# EAGLE board SparkFun_LilyPad-Switched-Battery-Panel-v10 (EAGLE 7.3.0)
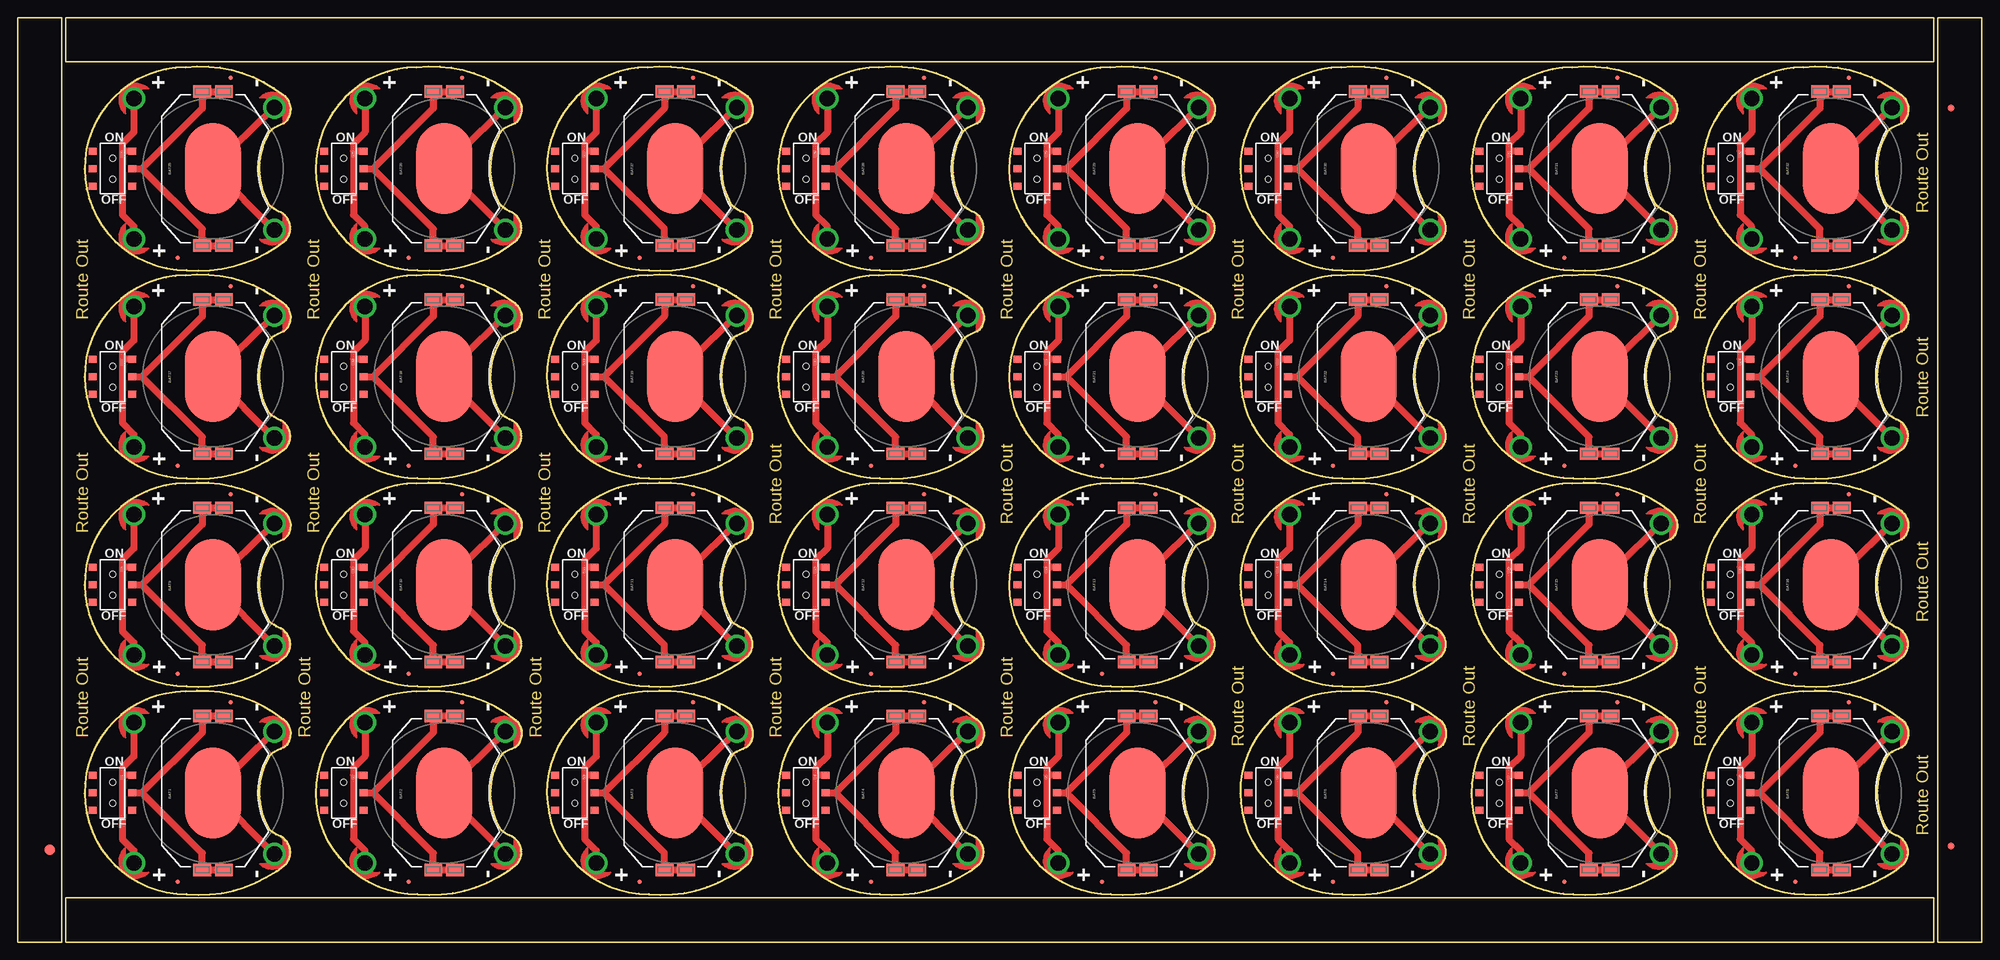
[diagram p0: board, top side]
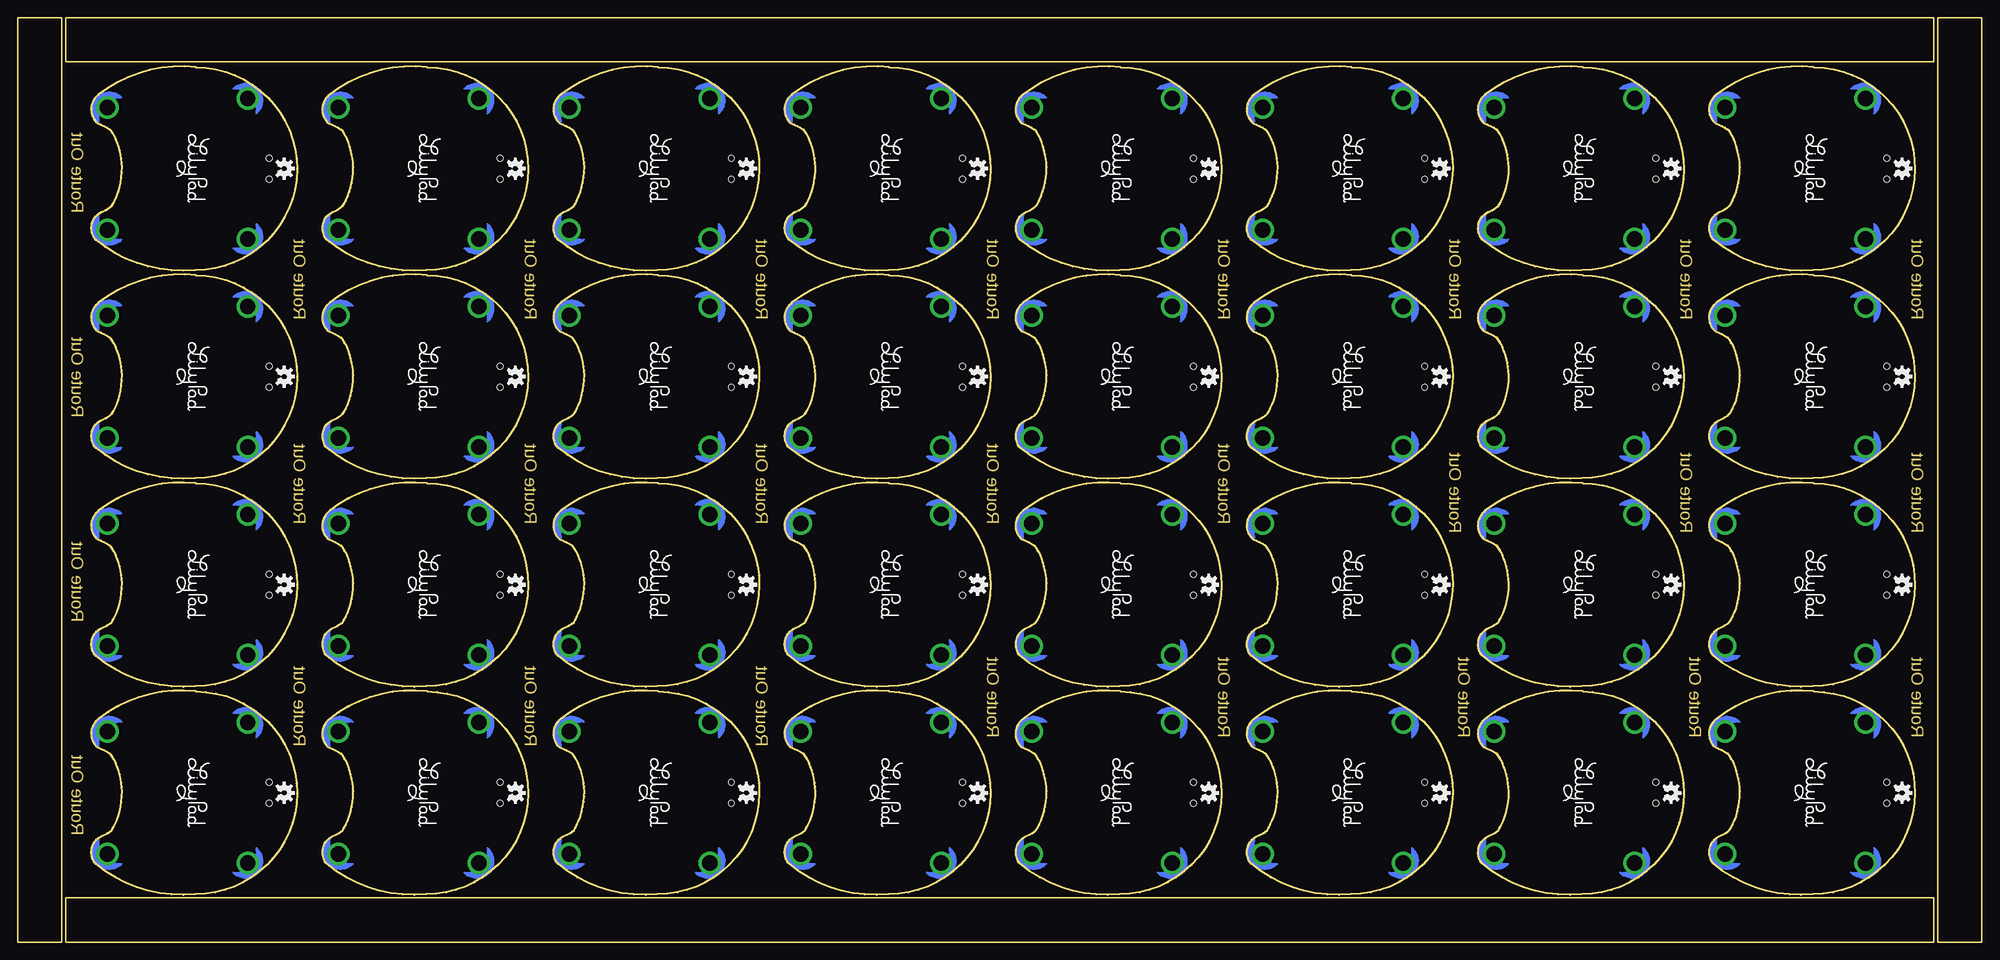
[diagram p1: board, bottom side, seen from below]

Size 280.67 x 132.08 mm. Coordinates in mm from the lower left corner, seen from the top.
Outline: 466 segments
Copper layers (1*16): Top 0.035mm / dielectric 1.5mm / Bottom 0.035mm
Design rules "default": minimum track width 8mil, minimum drill 20mil, track to track 8mil, track to pad 8mil, pad to pad 8mil, via to via 8mil, smd to smd 8mil, copper to edge 8mil, drill to drill 8mil, minimum pad ring 12mil, minimum via ring 10mil, stop-mask expansion 4mil, vias tented up to drill 20mil, thermal gap 10mil

## Footprints (pad centres in the part's own frame; a part is rotated, then mirrored left to right if it is on the bottom)
BATTCON_20MM_4LEGS = smd 1.778 x 2.54: 1 -11,1.55; 3 11,1.55; P$1 -11,-1.55; P$2 11,-1.55 | smd 13 x 8: 2 0,0
FIDUCIAL-1.5X3 = smd 1.5 x 1.5: 1 0,0
FIDUCIAL-1X2 = smd 1 x 1: 1 0,0
MICRO-FIDUCIAL = smd 0.635 x 0.635: 1 0,0
AYZ0202 = smd 1 x 1.15: 1 -2.5,2.825; 2 0,2.825; 3 2.5,2.825; 4 -2.5,-2.825; 5 0,-2.825; 6 2.5,-2.825 | hole 0.85: 1.5,0; -1.5,0
PETAL-SMALL-2SIDE = drill 2.2: 1 0,0

## Placement (x,y rotation side)
BAT1  [BATTCON_20MM_4LEGS]  27.94,21.34 90 top
BAT2  [BATTCON_20MM_4LEGS]  60.96,21.34 90 top
BAT3  [BATTCON_20MM_4LEGS]  93.98,21.34 90 top
BAT4  [BATTCON_20MM_4LEGS]  127,21.34 90 top
BAT5  [BATTCON_20MM_4LEGS]  160.02,21.34 90 top
BAT6  [BATTCON_20MM_4LEGS]  193.04,21.34 90 top
BAT7  [BATTCON_20MM_4LEGS]  226.06,21.34 90 top
BAT8  [BATTCON_20MM_4LEGS]  259.08,21.34 90 top
BAT9  [BATTCON_20MM_4LEGS]  27.94,51.05 90 top
BAT10  [BATTCON_20MM_4LEGS]  60.96,51.05 90 top
BAT11  [BATTCON_20MM_4LEGS]  93.98,51.05 90 top
BAT12  [BATTCON_20MM_4LEGS]  127,51.05 90 top
BAT13  [BATTCON_20MM_4LEGS]  160.02,51.05 90 top
BAT14  [BATTCON_20MM_4LEGS]  193.04,51.05 90 top
BAT15  [BATTCON_20MM_4LEGS]  226.06,51.05 90 top
BAT16  [BATTCON_20MM_4LEGS]  259.08,51.05 90 top
BAT17  [BATTCON_20MM_4LEGS]  27.94,80.77 90 top
BAT18  [BATTCON_20MM_4LEGS]  60.96,80.77 90 top
BAT19  [BATTCON_20MM_4LEGS]  93.98,80.77 90 top
BAT20  [BATTCON_20MM_4LEGS]  127,80.77 90 top
BAT21  [BATTCON_20MM_4LEGS]  160.02,80.77 90 top
BAT22  [BATTCON_20MM_4LEGS]  193.04,80.77 90 top
BAT23  [BATTCON_20MM_4LEGS]  226.06,80.77 90 top
BAT24  [BATTCON_20MM_4LEGS]  259.08,80.77 90 top
BAT25  [BATTCON_20MM_4LEGS]  27.94,110.49 90 top
BAT26  [BATTCON_20MM_4LEGS]  60.96,110.49 90 top
BAT27  [BATTCON_20MM_4LEGS]  93.98,110.49 90 top
BAT28  [BATTCON_20MM_4LEGS]  127,110.49 90 top
BAT29  [BATTCON_20MM_4LEGS]  160.02,110.49 90 top
BAT30  [BATTCON_20MM_4LEGS]  193.04,110.49 90 top
BAT31  [BATTCON_20MM_4LEGS]  226.06,110.49 90 top
BAT32  [BATTCON_20MM_4LEGS]  259.08,110.49 90 top
E$1  [FIDUCIAL-1.5X3]  4.57,13.21 0 top
E$5  [FIDUCIAL-1X2]  276.23,119.13 180 top
E$6  [FIDUCIAL-1X2]  276.23,13.72 0 top
JP1  FIDUCIALUFIDUCIAL  [MICRO-FIDUCIAL]  22.86,8.64 0 top
JP2  FIDUCIALUFIDUCIAL  [MICRO-FIDUCIAL]  30.48,34.29 0 top
JP3  FIDUCIALUFIDUCIAL  [MICRO-FIDUCIAL]  55.88,8.64 0 top
JP4  FIDUCIALUFIDUCIAL  [MICRO-FIDUCIAL]  63.5,34.29 0 top
JP5  FIDUCIALUFIDUCIAL  [MICRO-FIDUCIAL]  88.9,8.64 0 top
JP6  FIDUCIALUFIDUCIAL  [MICRO-FIDUCIAL]  96.52,34.29 0 top
JP7  FIDUCIALUFIDUCIAL  [MICRO-FIDUCIAL]  121.92,8.64 0 top
JP8  FIDUCIALUFIDUCIAL  [MICRO-FIDUCIAL]  129.54,34.29 0 top
JP9  FIDUCIALUFIDUCIAL  [MICRO-FIDUCIAL]  154.94,8.64 0 top
JP10  FIDUCIALUFIDUCIAL  [MICRO-FIDUCIAL]  162.56,34.29 0 top
JP11  FIDUCIALUFIDUCIAL  [MICRO-FIDUCIAL]  187.96,8.64 0 top
JP12  FIDUCIALUFIDUCIAL  [MICRO-FIDUCIAL]  195.58,34.29 0 top
JP13  FIDUCIALUFIDUCIAL  [MICRO-FIDUCIAL]  220.98,8.64 0 top
JP14  FIDUCIALUFIDUCIAL  [MICRO-FIDUCIAL]  228.6,34.29 0 top
JP15  FIDUCIALUFIDUCIAL  [MICRO-FIDUCIAL]  254,8.64 0 top
JP16  FIDUCIALUFIDUCIAL  [MICRO-FIDUCIAL]  261.62,34.29 0 top
JP17  FIDUCIALUFIDUCIAL  [MICRO-FIDUCIAL]  22.86,38.35 0 top
JP18  FIDUCIALUFIDUCIAL  [MICRO-FIDUCIAL]  30.48,64.01 0 top
JP19  FIDUCIALUFIDUCIAL  [MICRO-FIDUCIAL]  55.88,38.35 0 top
JP20  FIDUCIALUFIDUCIAL  [MICRO-FIDUCIAL]  63.5,64.01 0 top
JP21  FIDUCIALUFIDUCIAL  [MICRO-FIDUCIAL]  88.9,38.35 0 top
JP22  FIDUCIALUFIDUCIAL  [MICRO-FIDUCIAL]  96.52,64.01 0 top
JP23  FIDUCIALUFIDUCIAL  [MICRO-FIDUCIAL]  121.92,38.35 0 top
JP24  FIDUCIALUFIDUCIAL  [MICRO-FIDUCIAL]  129.54,64.01 0 top
JP25  FIDUCIALUFIDUCIAL  [MICRO-FIDUCIAL]  154.94,38.35 0 top
JP26  FIDUCIALUFIDUCIAL  [MICRO-FIDUCIAL]  162.56,64.01 0 top
JP27  FIDUCIALUFIDUCIAL  [MICRO-FIDUCIAL]  187.96,38.35 0 top
JP28  FIDUCIALUFIDUCIAL  [MICRO-FIDUCIAL]  195.58,64.01 0 top
JP29  FIDUCIALUFIDUCIAL  [MICRO-FIDUCIAL]  220.98,38.35 0 top
JP30  FIDUCIALUFIDUCIAL  [MICRO-FIDUCIAL]  228.6,64.01 0 top
JP31  FIDUCIALUFIDUCIAL  [MICRO-FIDUCIAL]  254,38.35 0 top
JP32  FIDUCIALUFIDUCIAL  [MICRO-FIDUCIAL]  261.62,64.01 0 top
JP33  FIDUCIALUFIDUCIAL  [MICRO-FIDUCIAL]  22.86,68.07 0 top
JP34  FIDUCIALUFIDUCIAL  [MICRO-FIDUCIAL]  30.48,93.73 0 top
JP35  FIDUCIALUFIDUCIAL  [MICRO-FIDUCIAL]  55.88,68.07 0 top
JP36  FIDUCIALUFIDUCIAL  [MICRO-FIDUCIAL]  63.5,93.73 0 top
JP37  FIDUCIALUFIDUCIAL  [MICRO-FIDUCIAL]  88.9,68.07 0 top
JP38  FIDUCIALUFIDUCIAL  [MICRO-FIDUCIAL]  96.52,93.73 0 top
JP39  FIDUCIALUFIDUCIAL  [MICRO-FIDUCIAL]  121.92,68.07 0 top
JP40  FIDUCIALUFIDUCIAL  [MICRO-FIDUCIAL]  129.54,93.73 0 top
JP41  FIDUCIALUFIDUCIAL  [MICRO-FIDUCIAL]  154.94,68.07 0 top
JP42  FIDUCIALUFIDUCIAL  [MICRO-FIDUCIAL]  162.56,93.73 0 top
JP43  FIDUCIALUFIDUCIAL  [MICRO-FIDUCIAL]  187.96,68.07 0 top
JP44  FIDUCIALUFIDUCIAL  [MICRO-FIDUCIAL]  195.58,93.73 0 top
JP45  FIDUCIALUFIDUCIAL  [MICRO-FIDUCIAL]  220.98,68.07 0 top
JP46  FIDUCIALUFIDUCIAL  [MICRO-FIDUCIAL]  228.6,93.73 0 top
JP47  FIDUCIALUFIDUCIAL  [MICRO-FIDUCIAL]  254,68.07 0 top
JP48  FIDUCIALUFIDUCIAL  [MICRO-FIDUCIAL]  261.62,93.73 0 top
JP49  FIDUCIALUFIDUCIAL  [MICRO-FIDUCIAL]  22.86,97.79 0 top
JP50  FIDUCIALUFIDUCIAL  [MICRO-FIDUCIAL]  30.48,123.44 0 top
JP51  FIDUCIALUFIDUCIAL  [MICRO-FIDUCIAL]  55.88,97.79 0 top
JP52  FIDUCIALUFIDUCIAL  [MICRO-FIDUCIAL]  63.5,123.44 0 top
JP53  FIDUCIALUFIDUCIAL  [MICRO-FIDUCIAL]  88.9,97.79 0 top
JP54  FIDUCIALUFIDUCIAL  [MICRO-FIDUCIAL]  96.52,123.44 0 top
JP55  FIDUCIALUFIDUCIAL  [MICRO-FIDUCIAL]  121.92,97.79 0 top
JP56  FIDUCIALUFIDUCIAL  [MICRO-FIDUCIAL]  129.54,123.44 0 top
JP57  FIDUCIALUFIDUCIAL  [MICRO-FIDUCIAL]  154.94,97.79 0 top
JP58  FIDUCIALUFIDUCIAL  [MICRO-FIDUCIAL]  162.56,123.44 0 top
JP59  FIDUCIALUFIDUCIAL  [MICRO-FIDUCIAL]  187.96,97.79 0 top
JP60  FIDUCIALUFIDUCIAL  [MICRO-FIDUCIAL]  195.58,123.44 0 top
JP61  FIDUCIALUFIDUCIAL  [MICRO-FIDUCIAL]  220.98,97.79 0 top
JP62  FIDUCIALUFIDUCIAL  [MICRO-FIDUCIAL]  228.6,123.44 0 top
JP63  FIDUCIALUFIDUCIAL  [MICRO-FIDUCIAL]  254,97.79 0 top
JP64  FIDUCIALUFIDUCIAL  [MICRO-FIDUCIAL]  261.62,123.44 0 top
S1  [AYZ0202]  13.59,21.34 270 top
S2  [AYZ0202]  46.61,21.34 270 top
S3  [AYZ0202]  79.63,21.34 270 top
S4  [AYZ0202]  112.65,21.34 270 top
S5  [AYZ0202]  145.67,21.34 270 top
S6  [AYZ0202]  178.69,21.34 270 top
S7  [AYZ0202]  211.71,21.34 270 top
S8  [AYZ0202]  244.73,21.34 270 top
S9  [AYZ0202]  13.59,51.05 270 top
S10  [AYZ0202]  46.61,51.05 270 top
S11  [AYZ0202]  79.63,51.05 270 top
S12  [AYZ0202]  112.65,51.05 270 top
S13  [AYZ0202]  145.67,51.05 270 top
S14  [AYZ0202]  178.69,51.05 270 top
S15  [AYZ0202]  211.71,51.05 270 top
S16  [AYZ0202]  244.73,51.05 270 top
S17  [AYZ0202]  13.59,80.77 270 top
S18  [AYZ0202]  46.61,80.77 270 top
S19  [AYZ0202]  79.63,80.77 270 top
S20  [AYZ0202]  112.65,80.77 270 top
S21  [AYZ0202]  145.67,80.77 270 top
S22  [AYZ0202]  178.69,80.77 270 top
S23  [AYZ0202]  211.71,80.77 270 top
S24  [AYZ0202]  244.73,80.77 270 top
S25  [AYZ0202]  13.59,110.49 270 top
S26  [AYZ0202]  46.61,110.49 270 top
S27  [AYZ0202]  79.63,110.49 270 top
S28  [AYZ0202]  112.65,110.49 270 top
S29  [AYZ0202]  145.67,110.49 270 top
S30  [AYZ0202]  178.69,110.49 270 top
S31  [AYZ0202]  211.71,110.49 270 top
S32  [AYZ0202]  244.73,110.49 270 top
U$1  SEWTAP6  [PETAL-SMALL-2SIDE]  36.7,12.57 47 top
U$2  SEWTAP6  [PETAL-SMALL-2SIDE]  16.64,11.3 313 top
U$3  SEWTAP6  [PETAL-SMALL-2SIDE]  36.7,30.1 133 top
U$4  SEWTAP6  [PETAL-SMALL-2SIDE]  16.64,31.37 227 top
U$5  LOGO-LPLP  [LOGO-LILYPAD]  24.13,21.34 270 bottom
U$6  SEWTAP6  [PETAL-SMALL-2SIDE]  69.72,12.57 47 top
U$7  OSHW-LOGOS  [OSHW-LOGO-S]  11.43,21.34 270 bottom
U$8  SEWTAP6  [PETAL-SMALL-2SIDE]  49.66,11.3 313 top
U$9  SEWTAP6  [PETAL-SMALL-2SIDE]  69.72,30.1 133 top
U$10  SEWTAP6  [PETAL-SMALL-2SIDE]  49.66,31.37 227 top
U$11  LOGO-LPLP  [LOGO-LILYPAD]  57.15,21.34 270 bottom
U$12  OSHW-LOGOS  [OSHW-LOGO-S]  44.45,21.34 270 bottom
U$13  SEWTAP6  [PETAL-SMALL-2SIDE]  102.74,12.57 47 top
U$14  SEWTAP6  [PETAL-SMALL-2SIDE]  82.68,11.3 313 top
U$15  SEWTAP6  [PETAL-SMALL-2SIDE]  102.74,30.1 133 top
U$16  SEWTAP6  [PETAL-SMALL-2SIDE]  82.68,31.37 227 top
U$17  LOGO-LPLP  [LOGO-LILYPAD]  90.17,21.34 270 bottom
U$18  OSHW-LOGOS  [OSHW-LOGO-S]  77.47,21.34 270 bottom
U$19  SEWTAP6  [PETAL-SMALL-2SIDE]  135.76,12.57 47 top
U$20  SEWTAP6  [PETAL-SMALL-2SIDE]  115.7,11.3 313 top
U$21  SEWTAP6  [PETAL-SMALL-2SIDE]  135.76,30.1 133 top
U$22  SEWTAP6  [PETAL-SMALL-2SIDE]  115.7,31.37 227 top
U$23  LOGO-LPLP  [LOGO-LILYPAD]  123.19,21.34 270 bottom
U$24  OSHW-LOGOS  [OSHW-LOGO-S]  110.49,21.34 270 bottom
U$25  SEWTAP6  [PETAL-SMALL-2SIDE]  168.78,12.57 47 top
U$26  SEWTAP6  [PETAL-SMALL-2SIDE]  148.72,11.3 313 top
U$27  SEWTAP6  [PETAL-SMALL-2SIDE]  168.78,30.1 133 top
U$28  SEWTAP6  [PETAL-SMALL-2SIDE]  148.72,31.37 227 top
U$29  LOGO-LPLP  [LOGO-LILYPAD]  156.21,21.34 270 bottom
U$30  OSHW-LOGOS  [OSHW-LOGO-S]  143.51,21.34 270 bottom
U$31  SEWTAP6  [PETAL-SMALL-2SIDE]  201.8,12.57 47 top
U$32  SEWTAP6  [PETAL-SMALL-2SIDE]  181.74,11.3 313 top
U$33  SEWTAP6  [PETAL-SMALL-2SIDE]  201.8,30.1 133 top
U$34  SEWTAP6  [PETAL-SMALL-2SIDE]  181.74,31.37 227 top
U$35  LOGO-LPLP  [LOGO-LILYPAD]  189.23,21.34 270 bottom
U$36  OSHW-LOGOS  [OSHW-LOGO-S]  176.53,21.34 270 bottom
U$37  SEWTAP6  [PETAL-SMALL-2SIDE]  234.82,12.57 47 top
U$38  SEWTAP6  [PETAL-SMALL-2SIDE]  214.76,11.3 313 top
U$39  SEWTAP6  [PETAL-SMALL-2SIDE]  234.82,30.1 133 top
U$40  SEWTAP6  [PETAL-SMALL-2SIDE]  214.76,31.37 227 top
U$41  LOGO-LPLP  [LOGO-LILYPAD]  222.25,21.34 270 bottom
U$42  OSHW-LOGOS  [OSHW-LOGO-S]  209.55,21.34 270 bottom
U$43  SEWTAP6  [PETAL-SMALL-2SIDE]  267.84,12.57 47 top
U$44  SEWTAP6  [PETAL-SMALL-2SIDE]  247.78,11.3 313 top
U$45  SEWTAP6  [PETAL-SMALL-2SIDE]  267.84,30.1 133 top
U$46  SEWTAP6  [PETAL-SMALL-2SIDE]  247.78,31.37 227 top
U$47  LOGO-LPLP  [LOGO-LILYPAD]  255.27,21.34 270 bottom
U$48  OSHW-LOGOS  [OSHW-LOGO-S]  242.57,21.34 270 bottom
U$49  SEWTAP6  [PETAL-SMALL-2SIDE]  36.7,42.29 47 top
U$50  SEWTAP6  [PETAL-SMALL-2SIDE]  16.64,41.02 313 top
U$51  SEWTAP6  [PETAL-SMALL-2SIDE]  36.7,59.82 133 top
U$52  SEWTAP6  [PETAL-SMALL-2SIDE]  16.64,61.09 227 top
U$53  LOGO-LPLP  [LOGO-LILYPAD]  24.13,51.05 270 bottom
U$54  OSHW-LOGOS  [OSHW-LOGO-S]  11.43,51.05 270 bottom
U$55  SEWTAP6  [PETAL-SMALL-2SIDE]  69.72,42.29 47 top
U$56  SEWTAP6  [PETAL-SMALL-2SIDE]  49.66,41.02 313 top
U$57  SEWTAP6  [PETAL-SMALL-2SIDE]  69.72,59.82 133 top
U$58  SEWTAP6  [PETAL-SMALL-2SIDE]  49.66,61.09 227 top
U$59  LOGO-LPLP  [LOGO-LILYPAD]  57.15,51.05 270 bottom
U$60  OSHW-LOGOS  [OSHW-LOGO-S]  44.45,51.05 270 bottom
U$61  SEWTAP6  [PETAL-SMALL-2SIDE]  102.74,42.29 47 top
U$62  SEWTAP6  [PETAL-SMALL-2SIDE]  82.68,41.02 313 top
U$63  SEWTAP6  [PETAL-SMALL-2SIDE]  102.74,59.82 133 top
U$64  SEWTAP6  [PETAL-SMALL-2SIDE]  82.68,61.09 227 top
U$65  LOGO-LPLP  [LOGO-LILYPAD]  90.17,51.05 270 bottom
U$66  OSHW-LOGOS  [OSHW-LOGO-S]  77.47,51.05 270 bottom
U$67  SEWTAP6  [PETAL-SMALL-2SIDE]  135.76,42.29 47 top
U$68  SEWTAP6  [PETAL-SMALL-2SIDE]  115.7,41.02 313 top
U$69  SEWTAP6  [PETAL-SMALL-2SIDE]  135.76,59.82 133 top
U$70  SEWTAP6  [PETAL-SMALL-2SIDE]  115.7,61.09 227 top
U$71  LOGO-LPLP  [LOGO-LILYPAD]  123.19,51.05 270 bottom
U$72  OSHW-LOGOS  [OSHW-LOGO-S]  110.49,51.05 270 bottom
U$73  SEWTAP6  [PETAL-SMALL-2SIDE]  168.78,42.29 47 top
U$74  SEWTAP6  [PETAL-SMALL-2SIDE]  148.72,41.02 313 top
U$75  SEWTAP6  [PETAL-SMALL-2SIDE]  168.78,59.82 133 top
U$76  SEWTAP6  [PETAL-SMALL-2SIDE]  148.72,61.09 227 top
U$77  LOGO-LPLP  [LOGO-LILYPAD]  156.21,51.05 270 bottom
U$78  OSHW-LOGOS  [OSHW-LOGO-S]  143.51,51.05 270 bottom
U$79  SEWTAP6  [PETAL-SMALL-2SIDE]  201.8,42.29 47 top
U$80  SEWTAP6  [PETAL-SMALL-2SIDE]  181.74,41.02 313 top
U$81  SEWTAP6  [PETAL-SMALL-2SIDE]  201.8,59.82 133 top
U$82  SEWTAP6  [PETAL-SMALL-2SIDE]  181.74,61.09 227 top
U$83  LOGO-LPLP  [LOGO-LILYPAD]  189.23,51.05 270 bottom
U$84  OSHW-LOGOS  [OSHW-LOGO-S]  176.53,51.05 270 bottom
U$85  SEWTAP6  [PETAL-SMALL-2SIDE]  234.82,42.29 47 top
U$86  SEWTAP6  [PETAL-SMALL-2SIDE]  214.76,41.02 313 top
U$87  SEWTAP6  [PETAL-SMALL-2SIDE]  234.82,59.82 133 top
U$88  SEWTAP6  [PETAL-SMALL-2SIDE]  214.76,61.09 227 top
U$89  LOGO-LPLP  [LOGO-LILYPAD]  222.25,51.05 270 bottom
U$90  OSHW-LOGOS  [OSHW-LOGO-S]  209.55,51.05 270 bottom
U$91  SEWTAP6  [PETAL-SMALL-2SIDE]  267.84,42.29 47 top
U$92  SEWTAP6  [PETAL-SMALL-2SIDE]  247.78,41.02 313 top
U$93  SEWTAP6  [PETAL-SMALL-2SIDE]  267.84,59.82 133 top
U$94  SEWTAP6  [PETAL-SMALL-2SIDE]  247.78,61.09 227 top
U$95  LOGO-LPLP  [LOGO-LILYPAD]  255.27,51.05 270 bottom
U$96  OSHW-LOGOS  [OSHW-LOGO-S]  242.57,51.05 270 bottom
U$97  SEWTAP6  [PETAL-SMALL-2SIDE]  36.7,72.01 47 top
U$98  SEWTAP6  [PETAL-SMALL-2SIDE]  16.64,70.74 313 top
U$99  SEWTAP6  [PETAL-SMALL-2SIDE]  36.7,89.53 133 top
U$100  SEWTAP6  [PETAL-SMALL-2SIDE]  16.64,90.81 227 top
U$101  LOGO-LPLP  [LOGO-LILYPAD]  24.13,80.77 270 bottom
U$102  OSHW-LOGOS  [OSHW-LOGO-S]  11.43,80.77 270 bottom
U$103  SEWTAP6  [PETAL-SMALL-2SIDE]  69.72,72.01 47 top
U$104  SEWTAP6  [PETAL-SMALL-2SIDE]  49.66,70.74 313 top
U$105  SEWTAP6  [PETAL-SMALL-2SIDE]  69.72,89.53 133 top
U$106  SEWTAP6  [PETAL-SMALL-2SIDE]  49.66,90.81 227 top
U$107  LOGO-LPLP  [LOGO-LILYPAD]  57.15,80.77 270 bottom
U$108  OSHW-LOGOS  [OSHW-LOGO-S]  44.45,80.77 270 bottom
U$109  SEWTAP6  [PETAL-SMALL-2SIDE]  102.74,72.01 47 top
U$110  SEWTAP6  [PETAL-SMALL-2SIDE]  82.68,70.74 313 top
U$111  SEWTAP6  [PETAL-SMALL-2SIDE]  102.74,89.53 133 top
U$112  SEWTAP6  [PETAL-SMALL-2SIDE]  82.68,90.81 227 top
U$113  LOGO-LPLP  [LOGO-LILYPAD]  90.17,80.77 270 bottom
U$114  OSHW-LOGOS  [OSHW-LOGO-S]  77.47,80.77 270 bottom
U$115  SEWTAP6  [PETAL-SMALL-2SIDE]  135.76,72.01 47 top
U$116  SEWTAP6  [PETAL-SMALL-2SIDE]  115.7,70.74 313 top
U$117  SEWTAP6  [PETAL-SMALL-2SIDE]  135.76,89.53 133 top
U$118  SEWTAP6  [PETAL-SMALL-2SIDE]  115.7,90.81 227 top
U$119  LOGO-LPLP  [LOGO-LILYPAD]  123.19,80.77 270 bottom
U$120  OSHW-LOGOS  [OSHW-LOGO-S]  110.49,80.77 270 bottom
U$121  SEWTAP6  [PETAL-SMALL-2SIDE]  168.78,72.01 47 top
U$122  SEWTAP6  [PETAL-SMALL-2SIDE]  148.72,70.74 313 top
U$123  SEWTAP6  [PETAL-SMALL-2SIDE]  168.78,89.53 133 top
U$124  SEWTAP6  [PETAL-SMALL-2SIDE]  148.72,90.81 227 top
U$125  LOGO-LPLP  [LOGO-LILYPAD]  156.21,80.77 270 bottom
U$126  OSHW-LOGOS  [OSHW-LOGO-S]  143.51,80.77 270 bottom
U$127  SEWTAP6  [PETAL-SMALL-2SIDE]  201.8,72.01 47 top
U$128  SEWTAP6  [PETAL-SMALL-2SIDE]  181.74,70.74 313 top
U$129  SEWTAP6  [PETAL-SMALL-2SIDE]  201.8,89.53 133 top
U$130  SEWTAP6  [PETAL-SMALL-2SIDE]  181.74,90.81 227 top
U$131  LOGO-LPLP  [LOGO-LILYPAD]  189.23,80.77 270 bottom
U$132  OSHW-LOGOS  [OSHW-LOGO-S]  176.53,80.77 270 bottom
U$133  SEWTAP6  [PETAL-SMALL-2SIDE]  234.82,72.01 47 top
U$134  SEWTAP6  [PETAL-SMALL-2SIDE]  214.76,70.74 313 top
U$135  SEWTAP6  [PETAL-SMALL-2SIDE]  234.82,89.53 133 top
U$136  SEWTAP6  [PETAL-SMALL-2SIDE]  214.76,90.81 227 top
U$137  LOGO-LPLP  [LOGO-LILYPAD]  222.25,80.77 270 bottom
U$138  OSHW-LOGOS  [OSHW-LOGO-S]  209.55,80.77 270 bottom
U$139  SEWTAP6  [PETAL-SMALL-2SIDE]  267.84,72.01 47 top
U$140  SEWTAP6  [PETAL-SMALL-2SIDE]  247.78,70.74 313 top
U$141  SEWTAP6  [PETAL-SMALL-2SIDE]  267.84,89.53 133 top
U$142  SEWTAP6  [PETAL-SMALL-2SIDE]  247.78,90.81 227 top
U$143  LOGO-LPLP  [LOGO-LILYPAD]  255.27,80.77 270 bottom
U$144  OSHW-LOGOS  [OSHW-LOGO-S]  242.57,80.77 270 bottom
U$145  SEWTAP6  [PETAL-SMALL-2SIDE]  36.7,101.73 47 top
U$146  SEWTAP6  [PETAL-SMALL-2SIDE]  16.64,100.46 313 top
U$147  SEWTAP6  [PETAL-SMALL-2SIDE]  36.7,119.25 133 top
U$148  SEWTAP6  [PETAL-SMALL-2SIDE]  16.64,120.52 227 top
U$149  LOGO-LPLP  [LOGO-LILYPAD]  24.13,110.49 270 bottom
U$150  OSHW-LOGOS  [OSHW-LOGO-S]  11.43,110.49 270 bottom
U$151  SEWTAP6  [PETAL-SMALL-2SIDE]  69.72,101.73 47 top
U$152  SEWTAP6  [PETAL-SMALL-2SIDE]  49.66,100.46 313 top
U$153  SEWTAP6  [PETAL-SMALL-2SIDE]  69.72,119.25 133 top
U$154  SEWTAP6  [PETAL-SMALL-2SIDE]  49.66,120.52 227 top
U$155  LOGO-LPLP  [LOGO-LILYPAD]  57.15,110.49 270 bottom
U$156  OSHW-LOGOS  [OSHW-LOGO-S]  44.45,110.49 270 bottom
U$157  SEWTAP6  [PETAL-SMALL-2SIDE]  102.74,101.73 47 top
U$158  SEWTAP6  [PETAL-SMALL-2SIDE]  82.68,100.46 313 top
U$159  SEWTAP6  [PETAL-SMALL-2SIDE]  102.74,119.25 133 top
U$160  SEWTAP6  [PETAL-SMALL-2SIDE]  82.68,120.52 227 top
U$161  LOGO-LPLP  [LOGO-LILYPAD]  90.17,110.49 270 bottom
U$162  OSHW-LOGOS  [OSHW-LOGO-S]  77.47,110.49 270 bottom
U$163  SEWTAP6  [PETAL-SMALL-2SIDE]  135.76,101.73 47 top
U$164  SEWTAP6  [PETAL-SMALL-2SIDE]  115.7,100.46 313 top
U$165  SEWTAP6  [PETAL-SMALL-2SIDE]  135.76,119.25 133 top
U$166  SEWTAP6  [PETAL-SMALL-2SIDE]  115.7,120.52 227 top
U$167  LOGO-LPLP  [LOGO-LILYPAD]  123.19,110.49 270 bottom
U$168  OSHW-LOGOS  [OSHW-LOGO-S]  110.49,110.49 270 bottom
U$169  SEWTAP6  [PETAL-SMALL-2SIDE]  168.78,101.73 47 top
U$170  SEWTAP6  [PETAL-SMALL-2SIDE]  148.72,100.46 313 top
U$171  SEWTAP6  [PETAL-SMALL-2SIDE]  168.78,119.25 133 top
U$172  SEWTAP6  [PETAL-SMALL-2SIDE]  148.72,120.52 227 top
U$173  LOGO-LPLP  [LOGO-LILYPAD]  156.21,110.49 270 bottom
U$174  OSHW-LOGOS  [OSHW-LOGO-S]  143.51,110.49 270 bottom
U$175  SEWTAP6  [PETAL-SMALL-2SIDE]  201.8,101.73 47 top
U$176  SEWTAP6  [PETAL-SMALL-2SIDE]  181.74,100.46 313 top
U$177  SEWTAP6  [PETAL-SMALL-2SIDE]  201.8,119.25 133 top
U$178  SEWTAP6  [PETAL-SMALL-2SIDE]  181.74,120.52 227 top
U$179  LOGO-LPLP  [LOGO-LILYPAD]  189.23,110.49 270 bottom
U$180  OSHW-LOGOS  [OSHW-LOGO-S]  176.53,110.49 270 bottom
U$181  SEWTAP6  [PETAL-SMALL-2SIDE]  234.82,101.73 47 top
U$182  SEWTAP6  [PETAL-SMALL-2SIDE]  214.76,100.46 313 top
U$183  SEWTAP6  [PETAL-SMALL-2SIDE]  234.82,119.25 133 top
U$184  SEWTAP6  [PETAL-SMALL-2SIDE]  214.76,120.52 227 top
U$185  LOGO-LPLP  [LOGO-LILYPAD]  222.25,110.49 270 bottom
U$186  OSHW-LOGOS  [OSHW-LOGO-S]  209.55,110.49 270 bottom
U$187  SEWTAP6  [PETAL-SMALL-2SIDE]  267.84,101.73 47 top
U$188  SEWTAP6  [PETAL-SMALL-2SIDE]  247.78,100.46 313 top
U$189  SEWTAP6  [PETAL-SMALL-2SIDE]  267.84,119.25 133 top
U$190  SEWTAP6  [PETAL-SMALL-2SIDE]  247.78,120.52 227 top
U$191  LOGO-LPLP  [LOGO-LILYPAD]  255.27,110.49 270 bottom
U$192  OSHW-LOGOS  [OSHW-LOGO-S]  242.57,110.49 270 bottom

## Library data of the parts
BAT1-BAT32 = SparkFun-Electromechanical
E$1 = SparkFun-Retired
E$5 E$6 U$7 U$12 U$18 U$24 U$30 U$36 U$42 U$48 U$54 U$60 U$66 U$72 U$78 U$84 U$90 U$96 U$102 U$108 U$114 U$120 U$126 U$132 U$138 U$144 U$150 U$156 U$162 U$168 U$174 U$180 U$186 U$192 = SparkFun-Aesthetics
JP1-JP64 S1-S32 = SparkFun
U$1-U$6 U$8-U$11 U$13-U$17 U$19-U$23 U$25-U$29 U$31-U$35 U$37-U$41 U$43-U$47 U$49-U$53 U$55-U$59 U$61-U$65 U$67-U$71 U$73-U$77 U$79-U$83 U$85-U$89 U$91-U$95 U$97-U$101 U$103-U$107 U$109-U$113 U$115-U$119 U$121-U$125 U$127-U$131 U$133-U$137 U$139-U$143 U$145-U$149 U$151-U$155 U$157-U$161 U$163-U$167 U$169-U$173 U$175-U$179 U$181-U$185 U$187-U$191 = LilyPad-Wearables

## Nets
N$1: S1.1 U$2.1 U$4.1
N$2: BAT1.2 U$1.1 U$3.1
N$3: BAT1.1 BAT1.3 BAT1.P$1 BAT1.P$2 S1.2
N$4: BAT2.2 U$6.1 U$9.1
N$5: S2.1 U$8.1 U$10.1
N$6: BAT2.1 BAT2.3 BAT2.P$1 BAT2.P$2 S2.2
N$7: BAT3.2 U$13.1 U$15.1
N$8: S3.1 U$14.1 U$16.1
N$9: BAT3.1 BAT3.3 BAT3.P$1 BAT3.P$2 S3.2
N$10: BAT4.2 U$19.1 U$21.1
N$11: S4.1 U$20.1 U$22.1
N$12: BAT4.1 BAT4.3 BAT4.P$1 BAT4.P$2 S4.2
N$13: BAT5.2 U$25.1 U$27.1
N$14: S5.1 U$26.1 U$28.1
N$15: BAT5.1 BAT5.3 BAT5.P$1 BAT5.P$2 S5.2
N$16: BAT6.2 U$31.1 U$33.1
N$17: S6.1 U$32.1 U$34.1
N$18: BAT6.1 BAT6.3 BAT6.P$1 BAT6.P$2 S6.2
N$19: BAT7.2 U$37.1 U$39.1
N$20: S7.1 U$38.1 U$40.1
N$21: BAT7.1 BAT7.3 BAT7.P$1 BAT7.P$2 S7.2
N$22: BAT8.2 U$43.1 U$45.1
N$23: S8.1 U$44.1 U$46.1
N$24: BAT8.1 BAT8.3 BAT8.P$1 BAT8.P$2 S8.2
N$25: BAT9.2 U$49.1 U$51.1
N$26: S9.1 U$50.1 U$52.1
N$27: BAT9.1 BAT9.3 BAT9.P$1 BAT9.P$2 S9.2
N$28: BAT10.2 U$55.1 U$57.1
N$29: S10.1 U$56.1 U$58.1
N$30: BAT10.1 BAT10.3 BAT10.P$1 BAT10.P$2 S10.2
N$31: BAT11.2 U$61.1 U$63.1
N$32: S11.1 U$62.1 U$64.1
N$33: BAT11.1 BAT11.3 BAT11.P$1 BAT11.P$2 S11.2
N$34: BAT12.2 U$67.1 U$69.1
N$35: S12.1 U$68.1 U$70.1
N$36: BAT12.1 BAT12.3 BAT12.P$1 BAT12.P$2 S12.2
N$37: BAT13.2 U$73.1 U$75.1
N$38: S13.1 U$74.1 U$76.1
N$39: BAT13.1 BAT13.3 BAT13.P$1 BAT13.P$2 S13.2
N$40: BAT14.2 U$79.1 U$81.1
N$41: S14.1 U$80.1 U$82.1
N$42: BAT14.1 BAT14.3 BAT14.P$1 BAT14.P$2 S14.2
N$43: BAT15.2 U$85.1 U$87.1
N$44: S15.1 U$86.1 U$88.1
N$45: BAT15.1 BAT15.3 BAT15.P$1 BAT15.P$2 S15.2
N$46: BAT16.2 U$91.1 U$93.1
N$47: S16.1 U$92.1 U$94.1
N$48: BAT16.1 BAT16.3 BAT16.P$1 BAT16.P$2 S16.2
N$49: BAT17.2 U$97.1 U$99.1
N$50: S17.1 U$98.1 U$100.1
N$51: BAT17.1 BAT17.3 BAT17.P$1 BAT17.P$2 S17.2
N$52: BAT18.2 U$103.1 U$105.1
N$53: S18.1 U$104.1 U$106.1
N$54: BAT18.1 BAT18.3 BAT18.P$1 BAT18.P$2 S18.2
N$55: BAT19.2 U$109.1 U$111.1
N$56: S19.1 U$110.1 U$112.1
N$57: BAT19.1 BAT19.3 BAT19.P$1 BAT19.P$2 S19.2
N$58: BAT20.2 U$115.1 U$117.1
N$59: S20.1 U$116.1 U$118.1
N$60: BAT20.1 BAT20.3 BAT20.P$1 BAT20.P$2 S20.2
N$61: BAT21.2 U$121.1 U$123.1
N$62: S21.1 U$122.1 U$124.1
N$63: BAT21.1 BAT21.3 BAT21.P$1 BAT21.P$2 S21.2
N$64: BAT22.2 U$127.1 U$129.1
N$65: S22.1 U$128.1 U$130.1
N$66: BAT22.1 BAT22.3 BAT22.P$1 BAT22.P$2 S22.2
N$67: BAT23.2 U$133.1 U$135.1
N$68: S23.1 U$134.1 U$136.1
N$69: BAT23.1 BAT23.3 BAT23.P$1 BAT23.P$2 S23.2
N$70: BAT24.2 U$139.1 U$141.1
N$71: S24.1 U$140.1 U$142.1
N$72: BAT24.1 BAT24.3 BAT24.P$1 BAT24.P$2 S24.2
N$73: BAT25.2 U$145.1 U$147.1
N$74: S25.1 U$146.1 U$148.1
N$75: BAT25.1 BAT25.3 BAT25.P$1 BAT25.P$2 S25.2
N$76: BAT26.2 U$151.1 U$153.1
N$77: S26.1 U$152.1 U$154.1
N$78: BAT26.1 BAT26.3 BAT26.P$1 BAT26.P$2 S26.2
N$79: BAT27.2 U$157.1 U$159.1
N$80: S27.1 U$158.1 U$160.1
N$81: BAT27.1 BAT27.3 BAT27.P$1 BAT27.P$2 S27.2
N$82: BAT28.2 U$163.1 U$165.1
N$83: S28.1 U$164.1 U$166.1
N$84: BAT28.1 BAT28.3 BAT28.P$1 BAT28.P$2 S28.2
N$85: BAT29.2 U$169.1 U$171.1
N$86: S29.1 U$170.1 U$172.1
N$87: BAT29.1 BAT29.3 BAT29.P$1 BAT29.P$2 S29.2
N$88: BAT30.2 U$175.1 U$177.1
N$89: S30.1 U$176.1 U$178.1
N$90: BAT30.1 BAT30.3 BAT30.P$1 BAT30.P$2 S30.2
N$91: BAT31.2 U$181.1 U$183.1
N$92: S31.1 U$182.1 U$184.1
N$93: BAT31.1 BAT31.3 BAT31.P$1 BAT31.P$2 S31.2
N$94: BAT32.2 U$187.1 U$189.1
N$95: S32.1 U$188.1 U$190.1
N$96: BAT32.1 BAT32.3 BAT32.P$1 BAT32.P$2 S32.2

## Tracks (layer width: path | path; a pad name or v marks a point on that pad's centre or on a via)
N$1
  Top 1.016: U$4.1 16.64,26.54 14.99,24.89 14.99,23.88 | 14.99,23.88 14.99,14.73 16.64,13.08 U$2.1 | S1.1 15.03,23.84 14.99,23.88
N$2
  Top 1.016: 37.59,11.68 U$1.1 BAT1.2 27.94,21.59 U$3.1
N$3
  Top 1.016: S1.2 17.78,21.34 | 17.78,21.34 26.39,12.73 BAT1.1 BAT1.P$1 | BAT1.P$2 BAT1.3 26.39,29.95 17.78,21.34
N$4
  Top 1.016: 70.61,11.68 U$6.1 BAT2.2 60.96,21.59 U$9.1
N$5
  Top 1.016: U$10.1 49.66,26.54 48.01,24.89 48.01,23.88 | 48.01,23.88 48.01,14.73 49.66,13.08 U$8.1 | S2.1 48.05,23.84 48.01,23.88
N$6
  Top 1.016: S2.2 50.8,21.34 | 50.8,21.34 59.41,12.73 BAT2.1 BAT2.P$1 | BAT2.P$2 BAT2.3 59.41,29.95 50.8,21.34
N$7
  Top 1.016: 103.63,11.68 U$13.1 BAT3.2 93.98,21.59 U$15.1
N$8
  Top 1.016: U$16.1 82.68,26.54 81.03,24.89 81.03,23.88 | 81.03,23.88 81.03,14.73 82.68,13.08 U$14.1 | S3.1 81.07,23.84 81.03,23.88
N$9
  Top 1.016: S3.2 83.82,21.34 | 83.82,21.34 92.43,12.73 BAT3.1 BAT3.P$1 | BAT3.P$2 BAT3.3 92.43,29.95 83.82,21.34
N$10
  Top 1.016: 136.65,11.68 U$19.1 BAT4.2 127,21.59 U$21.1
N$11
  Top 1.016: U$22.1 115.7,26.54 114.05,24.89 114.05,23.88 | 114.05,23.88 114.05,14.73 115.7,13.08 U$20.1 | S4.1 114.09,23.84 114.05,23.88
N$12
  Top 1.016: S4.2 116.84,21.34 | 116.84,21.34 125.45,12.73 BAT4.1 BAT4.P$1 | BAT4.P$2 BAT4.3 125.45,29.95 116.84,21.34
N$13
  Top 1.016: 169.67,11.68 U$25.1 BAT5.2 160.02,21.59 U$27.1
N$14
  Top 1.016: U$28.1 148.72,26.54 147.07,24.89 147.07,23.88 | 147.07,23.88 147.07,14.73 148.72,13.08 U$26.1 | S5.1 147.11,23.84 147.07,23.88
N$15
  Top 1.016: S5.2 149.86,21.34 | 149.86,21.34 158.47,12.73 BAT5.1 BAT5.P$1 | BAT5.P$2 BAT5.3 158.47,29.95 149.86,21.34
N$16
  Top 1.016: 202.69,11.68 U$31.1 BAT6.2 193.04,21.59 U$33.1
N$17
  Top 1.016: U$34.1 181.74,26.54 180.09,24.89 180.09,23.88 | 180.09,23.88 180.09,14.73 181.74,13.08 U$32.1 | S6.1 180.13,23.84 180.09,23.88
N$18
  Top 1.016: S6.2 182.88,21.34 | 182.88,21.34 191.49,12.73 BAT6.1 BAT6.P$1 | BAT6.P$2 BAT6.3 191.49,29.95 182.88,21.34
N$19
  Top 1.016: 235.71,11.68 U$37.1 BAT7.2 226.06,21.59 U$39.1
N$20
  Top 1.016: U$40.1 214.76,26.54 213.11,24.89 213.11,23.88 | 213.11,23.88 213.11,14.73 214.76,13.08 U$38.1 | S7.1 213.15,23.84 213.11,23.88
N$21
  Top 1.016: S7.2 215.9,21.34 | 215.9,21.34 224.51,12.73 BAT7.1 BAT7.P$1 | BAT7.P$2 BAT7.3 224.51,29.95 215.9,21.34
N$22
  Top 1.016: 268.73,11.68 U$43.1 BAT8.2 259.08,21.59 U$45.1
N$23
  Top 1.016: U$46.1 247.78,26.54 246.13,24.89 246.13,23.88 | 246.13,23.88 246.13,14.73 247.78,13.08 U$44.1 | S8.1 246.17,23.84 246.13,23.88
N$24
  Top 1.016: S8.2 248.92,21.34 | 248.92,21.34 257.53,12.73 BAT8.1 BAT8.P$1 | BAT8.P$2 BAT8.3 257.53,29.95 248.92,21.34
N$25
  Top 1.016: 37.59,41.4 U$49.1 BAT9.2 27.94,51.31 U$51.1
N$26
  Top 1.016: U$52.1 16.64,56.26 14.99,54.61 14.99,53.59 | 14.99,53.59 14.99,44.45 16.64,42.8 U$50.1 | S9.1 15.03,53.55 14.99,53.59
N$27
  Top 1.016: S9.2 17.78,51.05 | 17.78,51.05 26.39,42.44 BAT9.1 BAT9.P$1 | BAT9.P$2 BAT9.3 26.39,59.66 17.78,51.05
N$28
  Top 1.016: 70.61,41.4 U$55.1 BAT10.2 60.96,51.31 U$57.1
N$29
  Top 1.016: U$58.1 49.66,56.26 48.01,54.61 48.01,53.59 | 48.01,53.59 48.01,44.45 49.66,42.8 U$56.1 | S10.1 48.05,53.55 48.01,53.59
N$30
  Top 1.016: S10.2 50.8,51.05 | 50.8,51.05 59.41,42.44 BAT10.1 BAT10.P$1 | BAT10.P$2 BAT10.3 59.41,59.66 50.8,51.05
N$31
  Top 1.016: 103.63,41.4 U$61.1 BAT11.2 93.98,51.31 U$63.1
N$32
  Top 1.016: U$64.1 82.68,56.26 81.03,54.61 81.03,53.59 | 81.03,53.59 81.03,44.45 82.68,42.8 U$62.1 | S11.1 81.07,53.55 81.03,53.59
N$33
  Top 1.016: S11.2 83.82,51.05 | 83.82,51.05 92.43,42.44 BAT11.1 BAT11.P$1 | BAT11.P$2 BAT11.3 92.43,59.66 83.82,51.05
N$34
  Top 1.016: 136.65,41.4 U$67.1 BAT12.2 127,51.31 U$69.1
N$35
  Top 1.016: U$70.1 115.7,56.26 114.05,54.61 114.05,53.59 | 114.05,53.59 114.05,44.45 115.7,42.8 U$68.1 | S12.1 114.09,53.55 114.05,53.59
N$36
  Top 1.016: S12.2 116.84,51.05 | 116.84,51.05 125.45,42.44 BAT12.1 BAT12.P$1 | BAT12.P$2 BAT12.3 125.45,59.66 116.84,51.05
N$37
  Top 1.016: 169.67,41.4 U$73.1 BAT13.2 160.02,51.31 U$75.1
N$38
  Top 1.016: U$76.1 148.72,56.26 147.07,54.61 147.07,53.59 | 147.07,53.59 147.07,44.45 148.72,42.8 U$74.1 | S13.1 147.11,53.55 147.07,53.59
N$39
  Top 1.016: S13.2 149.86,51.05 | 149.86,51.05 158.47,42.44 BAT13.1 BAT13.P$1 | BAT13.P$2 BAT13.3 158.47,59.66 149.86,51.05
N$40
  Top 1.016: 202.69,41.4 U$79.1 BAT14.2 193.04,51.31 U$81.1
N$41
  Top 1.016: U$82.1 181.74,56.26 180.09,54.61 180.09,53.59 | 180.09,53.59 180.09,44.45 181.74,42.8 U$80.1 | S14.1 180.13,53.55 180.09,53.59
N$42
  Top 1.016: S14.2 182.88,51.05 | 182.88,51.05 191.49,42.44 BAT14.1 BAT14.P$1 | BAT14.P$2 BAT14.3 191.49,59.66 182.88,51.05
N$43
  Top 1.016: 235.71,41.4 U$85.1 BAT15.2 226.06,51.31 U$87.1
N$44
  Top 1.016: U$88.1 214.76,56.26 213.11,54.61 213.11,53.59 | 213.11,53.59 213.11,44.45 214.76,42.8 U$86.1 | S15.1 213.15,53.55 213.11,53.59
N$45
  Top 1.016: S15.2 215.9,51.05 | 215.9,51.05 224.51,42.44 BAT15.1 BAT15.P$1 | BAT15.P$2 BAT15.3 224.51,59.66 215.9,51.05
N$46
  Top 1.016: 268.73,41.4 U$91.1 BAT16.2 259.08,51.31 U$93.1
N$47
  Top 1.016: U$94.1 247.78,56.26 246.13,54.61 246.13,53.59 | 246.13,53.59 246.13,44.45 247.78,42.8 U$92.1 | S16.1 246.17,53.55 246.13,53.59
N$48
  Top 1.016: S16.2 248.92,51.05 | 248.92,51.05 257.53,42.44 BAT16.1 BAT16.P$1 | BAT16.P$2 BAT16.3 257.53,59.66 248.92,51.05
N$49
  Top 1.016: 37.59,71.12 U$97.1 BAT17.2 27.94,81.03 U$99.1
N$50
  Top 1.016: U$100.1 16.64,85.98 14.99,84.33 14.99,83.31 | 14.99,83.31 14.99,74.17 16.64,72.52 U$98.1 | S17.1 15.03,83.27 14.99,83.31
N$51
  Top 1.016: S17.2 17.78,80.77 | 17.78,80.77 26.39,72.16 BAT17.1 BAT17.P$1 | BAT17.P$2 BAT17.3 26.39,89.38 17.78,80.77
N$52
  Top 1.016: 70.61,71.12 U$103.1 BAT18.2 60.96,81.03 U$105.1
N$53
  Top 1.016: U$106.1 49.66,85.98 48.01,84.33 48.01,83.31 | 48.01,83.31 48.01,74.17 49.66,72.52 U$104.1 | S18.1 48.05,83.27 48.01,83.31
N$54
  Top 1.016: S18.2 50.8,80.77 | 50.8,80.77 59.41,72.16 BAT18.1 BAT18.P$1 | BAT18.P$2 BAT18.3 59.41,89.38 50.8,80.77
N$55
  Top 1.016: 103.63,71.12 U$109.1 BAT19.2 93.98,81.03 U$111.1
N$56
  Top 1.016: U$112.1 82.68,85.98 81.03,84.33 81.03,83.31 | 81.03,83.31 81.03,74.17 82.68,72.52 U$110.1 | S19.1 81.07,83.27 81.03,83.31
N$57
  Top 1.016: S19.2 83.82,80.77 | 83.82,80.77 92.43,72.16 BAT19.1 BAT19.P$1 | BAT19.P$2 BAT19.3 92.43,89.38 83.82,80.77
N$58
  Top 1.016: 136.65,71.12 U$115.1 BAT20.2 127,81.03 U$117.1
N$59
  Top 1.016: U$118.1 115.7,85.98 114.05,84.33 114.05,83.31 | 114.05,83.31 114.05,74.17 115.7,72.52 U$116.1 | S20.1 114.09,83.27 114.05,83.31
N$60
  Top 1.016: S20.2 116.84,80.77 | 116.84,80.77 125.45,72.16 BAT20.1 BAT20.P$1 | BAT20.P$2 BAT20.3 125.45,89.38 116.84,80.77
N$61
  Top 1.016: 169.67,71.12 U$121.1 BAT21.2 160.02,81.03 U$123.1
N$62
  Top 1.016: U$124.1 148.72,85.98 147.07,84.33 147.07,83.31 | 147.07,83.31 147.07,74.17 148.72,72.52 U$122.1 | S21.1 147.11,83.27 147.07,83.31
N$63
  Top 1.016: S21.2 149.86,80.77 | 149.86,80.77 158.47,72.16 BAT21.1 BAT21.P$1 | BAT21.P$2 BAT21.3 158.47,89.38 149.86,80.77
N$64
  Top 1.016: 202.69,71.12 U$127.1 BAT22.2 193.04,81.03 U$129.1
N$65
  Top 1.016: U$130.1 181.74,85.98 180.09,84.33 180.09,83.31 | 180.09,83.31 180.09,74.17 181.74,72.52 U$128.1 | S22.1 180.13,83.27 180.09,83.31
N$66
  Top 1.016: S22.2 182.88,80.77 | 182.88,80.77 191.49,72.16 BAT22.1 BAT22.P$1 | BAT22.P$2 BAT22.3 191.49,89.38 182.88,80.77
N$67
  Top 1.016: 235.71,71.12 U$133.1 BAT23.2 226.06,81.03 U$135.1
N$68
  Top 1.016: U$136.1 214.76,85.98 213.11,84.33 213.11,83.31 | 213.11,83.31 213.11,74.17 214.76,72.52 U$134.1 | S23.1 213.15,83.27 213.11,83.31
N$69
  Top 1.016: S23.2 215.9,80.77 | 215.9,80.77 224.51,72.16 BAT23.1 BAT23.P$1 | BAT23.P$2 BAT23.3 224.51,89.38 215.9,80.77
N$70
  Top 1.016: 268.73,71.12 U$139.1 BAT24.2 259.08,81.03 U$141.1
N$71
  Top 1.016: U$142.1 247.78,85.98 246.13,84.33 246.13,83.31 | 246.13,83.31 246.13,74.17 247.78,72.52 U$140.1 | S24.1 246.17,83.27 246.13,83.31
N$72
  Top 1.016: S24.2 248.92,80.77 | 248.92,80.77 257.53,72.16 BAT24.1 BAT24.P$1 | BAT24.P$2 BAT24.3 257.53,89.38 248.92,80.77
N$73
  Top 1.016: 37.59,100.84 U$145.1 BAT25.2 27.94,110.74 U$147.1
N$74
  Top 1.016: U$148.1 16.64,115.7 14.99,114.05 14.99,113.03 | 14.99,113.03 14.99,103.89 16.64,102.23 U$146.1 | S25.1 15.03,112.99 14.99,113.03
N$75
  Top 1.016: S25.2 17.78,110.49 | 17.78,110.49 26.39,101.88 BAT25.1 BAT25.P$1 | BAT25.P$2 BAT25.3 26.39,119.1 17.78,110.49
N$76
  Top 1.016: 70.61,100.84 U$151.1 BAT26.2 60.96,110.74 U$153.1
N$77
  Top 1.016: U$154.1 49.66,115.7 48.01,114.05 48.01,113.03 | 48.01,113.03 48.01,103.89 49.66,102.23 U$152.1 | S26.1 48.05,112.99 48.01,113.03
N$78
  Top 1.016: S26.2 50.8,110.49 | 50.8,110.49 59.41,101.88 BAT26.1 BAT26.P$1 | BAT26.P$2 BAT26.3 59.41,119.1 50.8,110.49
N$79
  Top 1.016: 103.63,100.84 U$157.1 BAT27.2 93.98,110.74 U$159.1
N$80
  Top 1.016: U$160.1 82.68,115.7 81.03,114.05 81.03,113.03 | 81.03,113.03 81.03,103.89 82.68,102.23 U$158.1 | S27.1 81.07,112.99 81.03,113.03
N$81
  Top 1.016: S27.2 83.82,110.49 | 83.82,110.49 92.43,101.88 BAT27.1 BAT27.P$1 | BAT27.P$2 BAT27.3 92.43,119.1 83.82,110.49
N$82
  Top 1.016: 136.65,100.84 U$163.1 BAT28.2 127,110.74 U$165.1
N$83
  Top 1.016: U$166.1 115.7,115.7 114.05,114.05 114.05,113.03 | 114.05,113.03 114.05,103.89 115.7,102.23 U$164.1 | S28.1 114.09,112.99 114.05,113.03
N$84
  Top 1.016: S28.2 116.84,110.49 | 116.84,110.49 125.45,101.88 BAT28.1 BAT28.P$1 | BAT28.P$2 BAT28.3 125.45,119.1 116.84,110.49
N$85
  Top 1.016: 169.67,100.84 U$169.1 BAT29.2 160.02,110.74 U$171.1
N$86
  Top 1.016: U$172.1 148.72,115.7 147.07,114.05 147.07,113.03 | 147.07,113.03 147.07,103.89 148.72,102.23 U$170.1 | S29.1 147.11,112.99 147.07,113.03
N$87
  Top 1.016: S29.2 149.86,110.49 | 149.86,110.49 158.47,101.88 BAT29.1 BAT29.P$1 | BAT29.P$2 BAT29.3 158.47,119.1 149.86,110.49
N$88
  Top 1.016: 202.69,100.84 U$175.1 BAT30.2 193.04,110.74 U$177.1
N$89
  Top 1.016: U$178.1 181.74,115.7 180.09,114.05 180.09,113.03 | 180.09,113.03 180.09,103.89 181.74,102.23 U$176.1 | S30.1 180.13,112.99 180.09,113.03
N$90
  Top 1.016: S30.2 182.88,110.49 | 182.88,110.49 191.49,101.88 BAT30.1 BAT30.P$1 | BAT30.P$2 BAT30.3 191.49,119.1 182.88,110.49
N$91
  Top 1.016: 235.71,100.84 U$181.1 BAT31.2 226.06,110.74 U$183.1
N$92
  Top 1.016: U$184.1 214.76,115.7 213.11,114.05 213.11,113.03 | 213.11,113.03 213.11,103.89 214.76,102.23 U$182.1 | S31.1 213.15,112.99 213.11,113.03
N$93
  Top 1.016: S31.2 215.9,110.49 | 215.9,110.49 224.51,101.88 BAT31.1 BAT31.P$1 | BAT31.P$2 BAT31.3 224.51,119.1 215.9,110.49
N$94
  Top 1.016: 268.73,100.84 U$187.1 BAT32.2 259.08,110.74 U$189.1
N$95
  Top 1.016: U$190.1 247.78,115.7 246.13,114.05 246.13,113.03 | 246.13,113.03 246.13,103.89 247.78,102.23 U$188.1 | S32.1 246.17,112.99 246.13,113.03
N$96
  Top 1.016: S32.2 248.92,110.49 | 248.92,110.49 257.53,101.88 BAT32.1 BAT32.P$1 | BAT32.P$2 BAT32.3 257.53,119.1 248.92,110.49

## Text on the board
Dimension: Route Out | Route Out | Route Out | Route Out | Route Out | Route Out | Route Out | Route Out | Route Out | Route Out | Route Out | Route Out | Route Out | Route Out | Route Out | Route Out | Route Out | Route Out | Route Out | Route Out | Route Out | Route Out | Route Out | Route Out | Route Out | Route Out | Route Out | Route Out
tPlace: - | - | - | - | - | - | - | - | + | + | + | + | + | + | + | + | ON | ON | ON | ON | ON | ON | ON | ON | OFF | OFF | OFF | OFF | OFF | OFF | OFF | OFF | + | + | + | + | + | + | + | + | - | - | - | - | - | - | - | - | - | - | - | - | - | - | - | - | + | + | + | + | + | + | + | + | ON | ON | ON | ON | ON | ON | ON | ON | OFF | OFF | OFF | OFF | OFF | OFF | OFF | OFF | + | + | + | + | + | + | + | + | - | - | - | - | - | - | - | - | - | - | - | - | - | - | - | - | + | + | + | + | + | + | + | + | ON | ON | ON | ON | ON | ON | ON | ON | OFF | OFF | OFF | OFF | OFF | OFF | OFF | OFF | + | + | + | + | + | + | + | + | - | - | - | - | - | - | - | - | - | - | - | - | - | - | - | - | + | + | + | + | + | + | + | + | ON | ON | ON | ON | ON | ON | ON | ON | OFF | OFF | OFF | OFF | OFF | OFF | OFF | OFF | + | + | + | + | + | + | + | + | - | - | - | - | - | - | - | -